# Altium PCB PCB1.PcbDoc
Units mil, origin at the board's own origin, x right, y up, seen from the top; angles counter-clockwise.
Board outline 2732.87 x 2035 mil, 2 copper layers (Top Layer, Bottom Layer); 21 components, 20 nets, 76 pads, 0 vias.
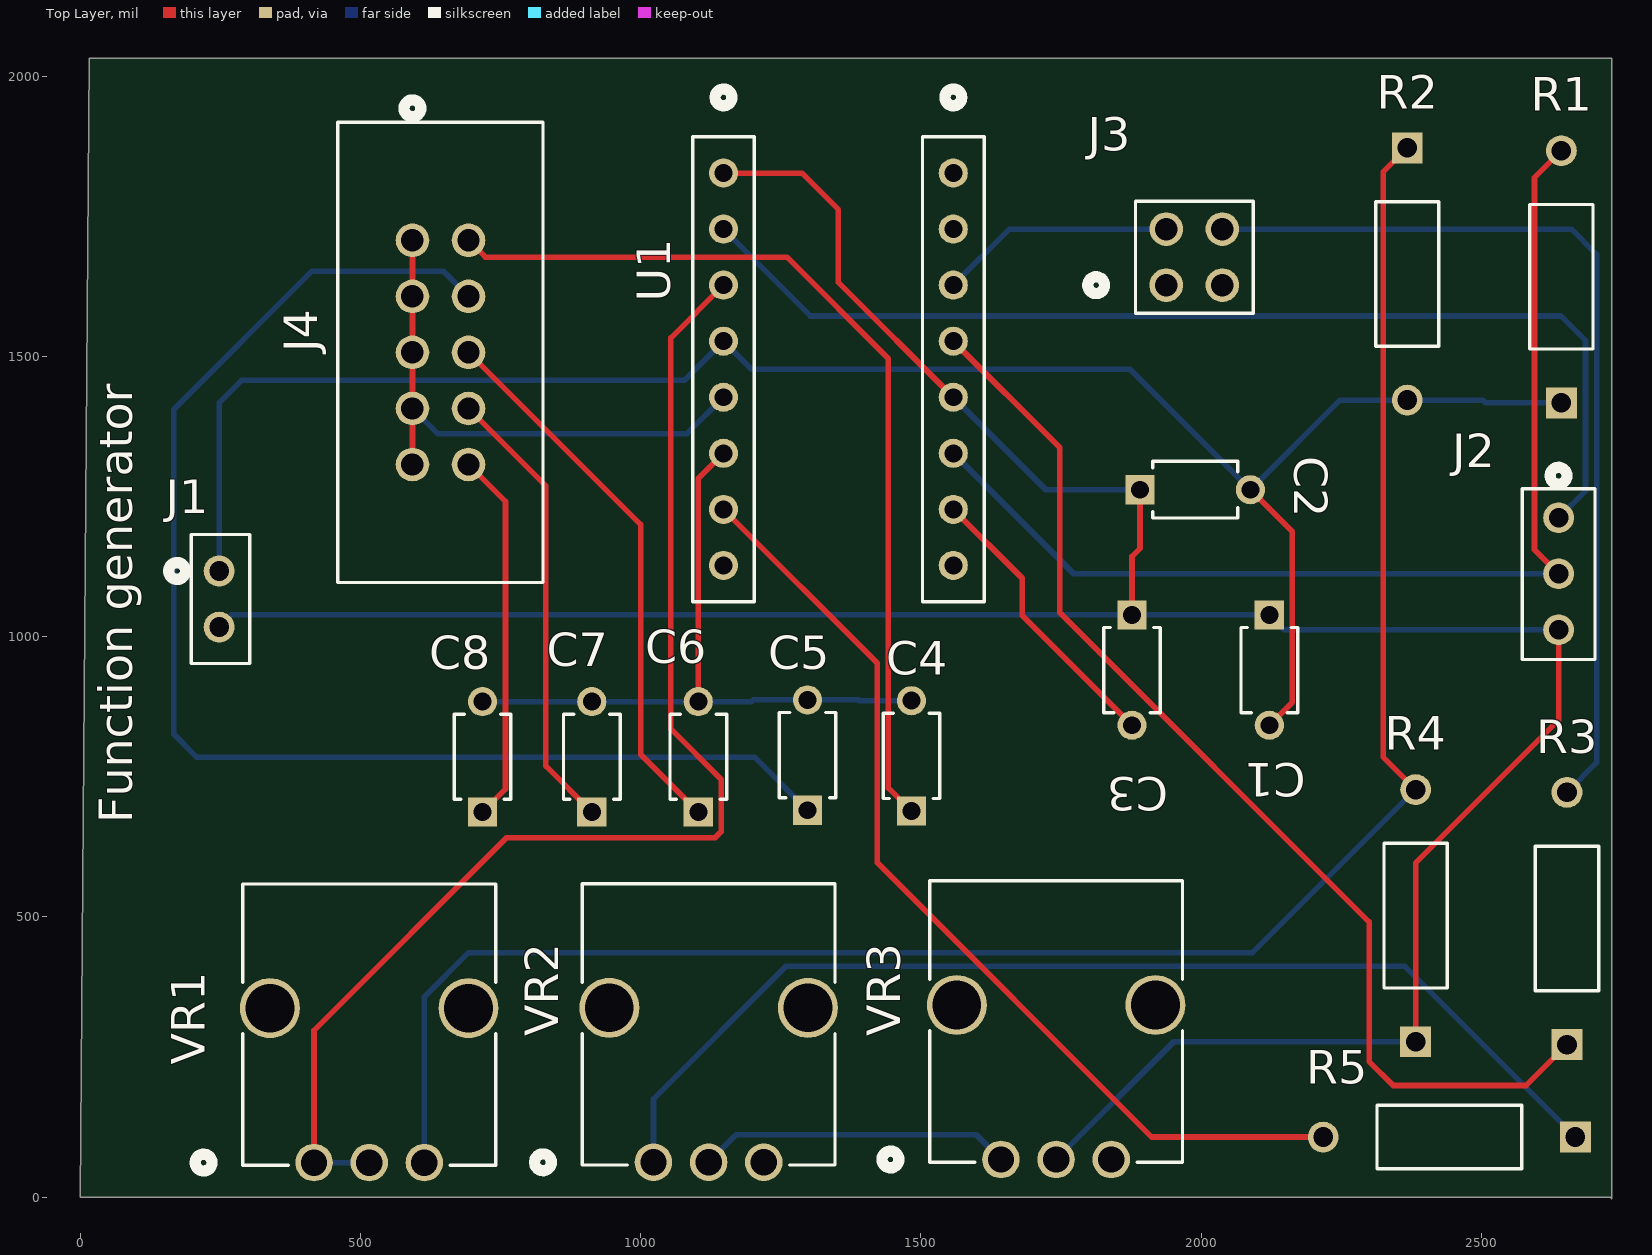
[diagram p0: Top Layer view]
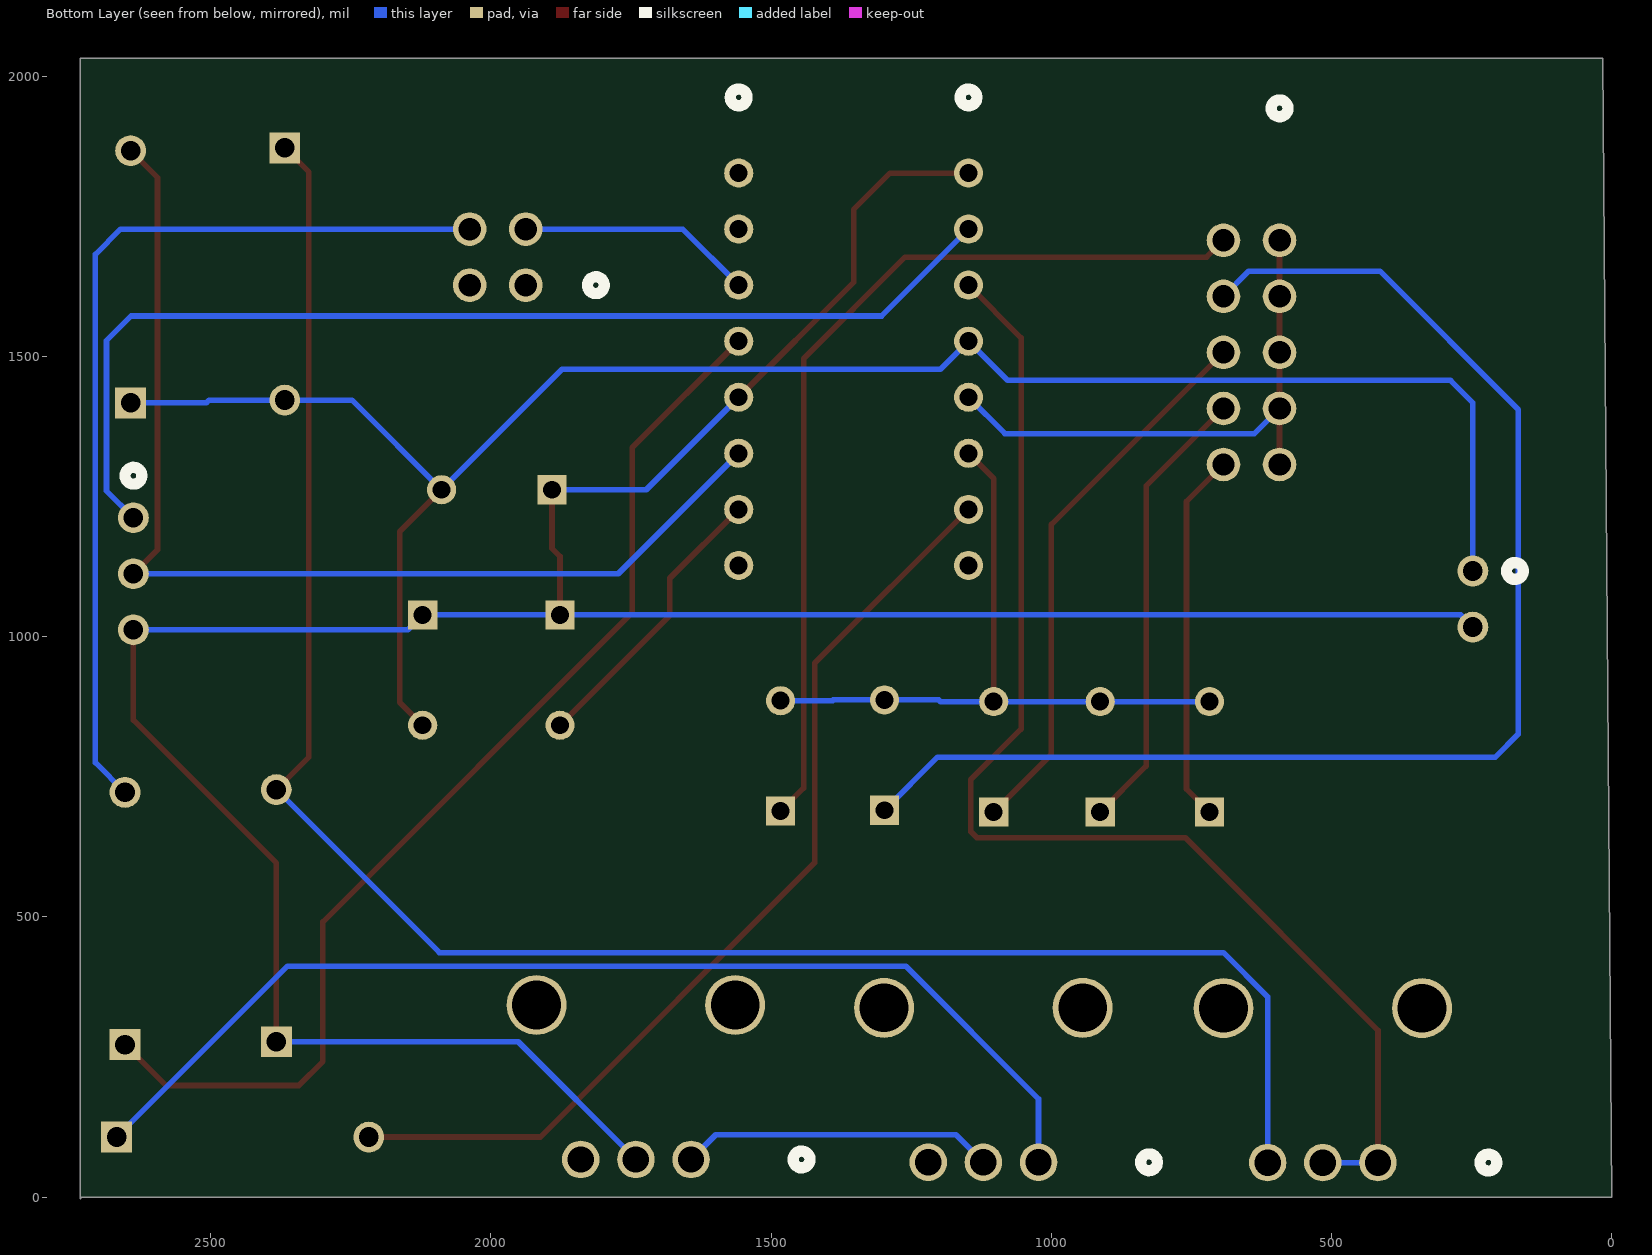
[diagram p1: Bottom Layer view, seen from below]
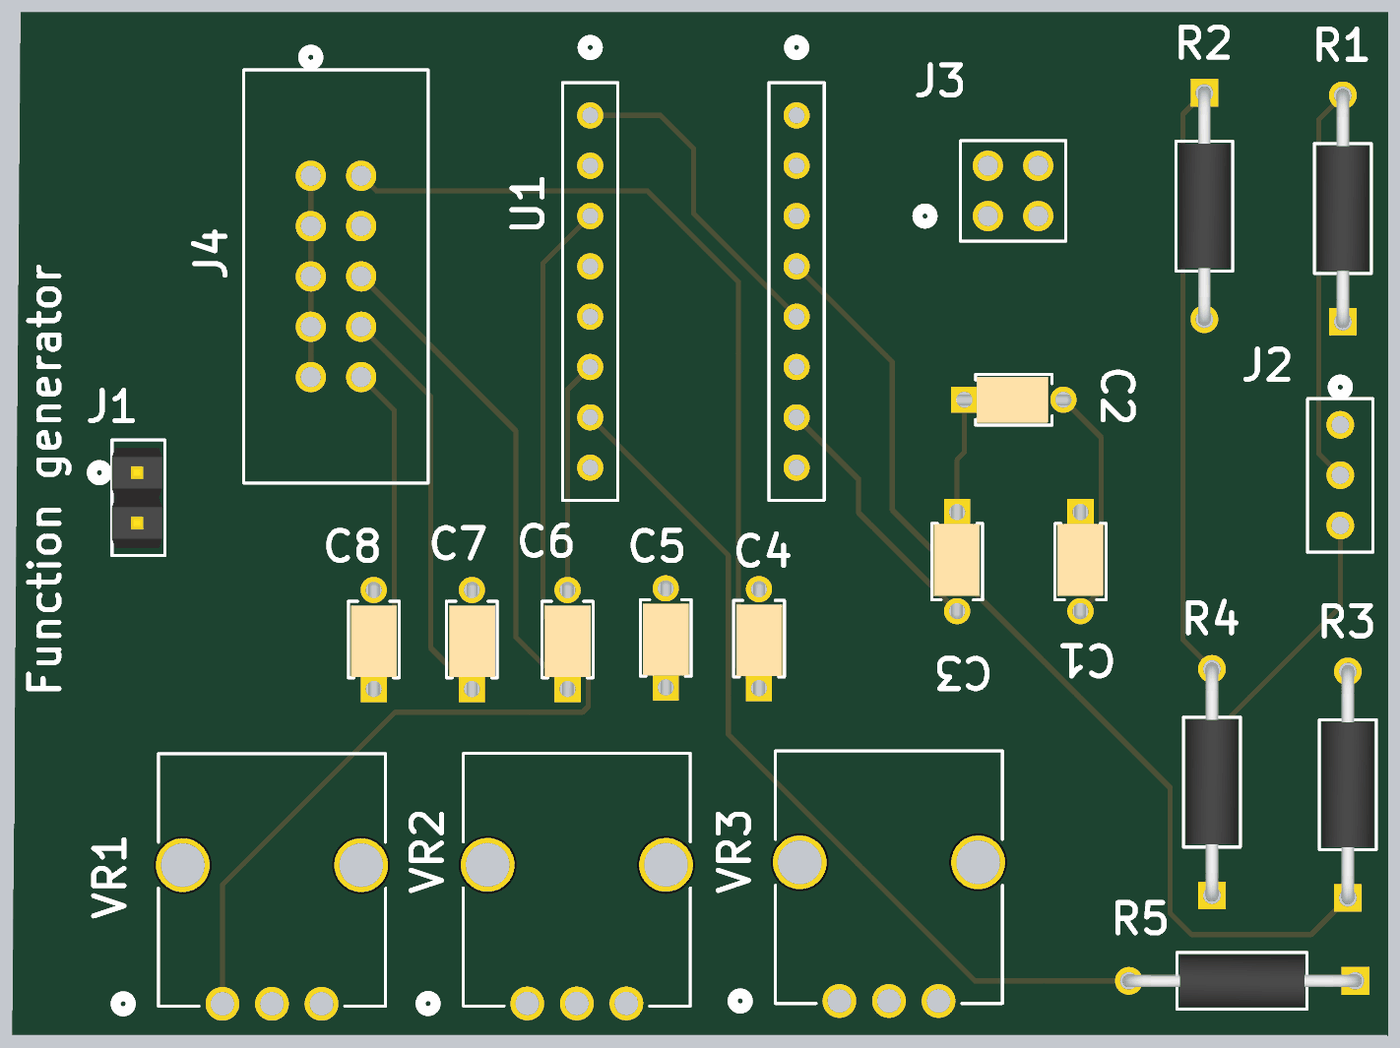
[diagram p2: 3D render of the assembled board from above, using the file's embedded part models]

## Layer stack, top to bottom
Top Solder: solder mask 0.4, Solder Resist, Dk 3.5
Top Layer: signal copper 1.4
Dielectric 1: dielectric 12.6, FR-4, Dk 4.8
Bottom Layer: signal copper 1.4
Bottom Solder: solder mask 0.4, Solder Resist, Dk 3.5

## Board outline
16.54,2032.05 2732.87,2032.05 2732.87,-2.95 2729.92,0 0,0

## Design rules (kind name [scope] priority, off if disabled: settings)
Clearance [All] p1: gap=10 ignorepadtopadclearanceinfootprint=FALSE
PolygonConnect [All] p1: connectstyle=Relief reliefconductorwidth=10 reliefentries=4 polygonreliefangle="90 Angle" airgapwidth=10
RoutingVias [All] p1: holewidth=28 width=50 viastyle="Through Hole" minholewidth=28 minwidth=50 maxholewidth=28 maxwidth=50
SolderMaskExpansion [All] p1: expansion=4 istentingtop=FALSE
SupplyNets "Schematic Supply Nets" [InNet('GND')] p1: voltage=0.000
Width [All] p1: maxlimit=10 minlimit=10 preferedwidth=10
30 further rules are at their usual default settings.

## Components (designator, comment, footprint, x,y, rotation, side; value= is the part's Value field where it differs from the comment)
C1 "0.1uf" PCBComponent_1 2151.75,993.66 r270 top value=100µF
C2 "100uf" PCBComponent_1 1936.02,1292.05 r0 top value=100µF
C3 "10uf" PCBComponent_1 1906.75,993.66 r270 top value=100µF
C4 "10uf" PCBComponent_1 1453.13,733.75 r90 top value=100µF
C5 "1uf" PCBComponent_1 1267.87,735.2 r90 top value=100µF
C6 "47000pf" PCBComponent_1 1072.87,732.05 r90 top value=100µF
C7 "2200pf" PCBComponent_1 882.87,732.05 r90 top value=100µF
C8 "100pf" PCBComponent_1 687.87,732.05 r90 top value=100µF
J1 "2x1" "PCBComponent_1 - duplicate4" 252.87,1062.05 r270 top
J2 "3x1" "PCBComponent_1 - duplicate7" 2637.87,1112.05 r180 top
J3 "2x2" "PCBComponent_1 - duplicate6" 1937.87,1627.05 r0 top
J4 "2x5" "PCBComponent_1 - duplicate5" 457.87,1927.05 r270 top
R1 "1k" "PCBComponent_1 - duplicate" 2652.87,1657.05 r90 top value=1kR
R2 "5k1" "PCBComponent_1 - duplicate" 2357.87,1632.05 r270 top value=5.1kΩ
R3 "330" "PCBComponent_1 - duplicate" 2662.87,512.05 r90 top value=330Ω
R4 "5k1" "PCBComponent_1 - duplicate" 2392.87,517.05 r90 top value=5.1kΩ
R5 "5k1" "PCBComponent_1 - duplicate" 2427.87,117.05 r180 top value=5.1kΩ
U1 "XR2206" "PCBComponent_1 - duplicate2" 1302.87,1552.05 r0 top
VR1 "50k" "PCBComponent_1 - duplicate3" 537.28,276.46 r0 top value=50kΩ
VR2 "50k" "PCBComponent_1 - duplicate3" 1142.87,277.05 r0 top value=50kΩ
VR3 "100k" "PCBComponent_1 - duplicate3" 1762.87,282.05 r0 top value=50kΩ

## Footprints (in the part's own frame and the unit in brackets; to place one, negate y for a bottom-side part, rotate by r counter-clockwise, add the part's x,y. Pads: shape width x height; smd on the part's side, far side on the other; paste and mask are expansions set on the pad)
PCBComponent_1 [mil]
  rect 52x52 / inner round 60 / far side rect 52x52 hole 32 paste-99999 mask+0: 1(-45,-30)
  round 52 / inner round 60 / far side round 52 hole 32 paste-99999 mask+0: 2(151.85,-30)
  silkscreen extent -23,-80 129,21, body extent -70,-76 170,15, height 142
"PCBComponent_1 - duplicate" [mil]
  rect 55x55 / inner round 60 / far side rect 55x55 hole 35 paste-99999 mask+0: 1(-240,10)
  round 55 / inner round 60 / far side round 55 hole 35 paste-99999 mask+0: 2(210,10)
  silkscreen extent -144,-47 114,66, body extent -252,-41 222,61, height 103
"PCBComponent_1 - duplicate2" [mil]
  round 52 / inner round 60 / far side round 52 hole 32 paste-99999 mask+0: 1(-155,275) 2(-155,175) 3(-155,75) 4(-155,-25) 5(-155,-125) 6(-155,-225) 7(-155,-325) 8(-155,-425) 9(255,-425) 10(255,-325) 11(255,-225) 12(255,-125) 13(255,-25) 14(255,75) 15(255,175) 16(255,275)
  silkscreen extent -210,-490 310,425
"PCBComponent_1 - duplicate3" [mil]
  round 67 / inner round 60 / far side round 67 hole 47 paste-99999 mask+0: 1(-120,-215) 2w(-21.58,-215) 3(76.85,-215)
  round 107 / inner round 60 / far side round 107 hole 87 unplated: 4(-198.74,60.59) 5(155.59,60.59)
  silkscreen extent -332,-230 204,282
"PCBComponent_1 - duplicate4" [mil]
  round 55 / inner round 60 / far side round 55 hole 35 paste-99999 mask+0: 1(-55,-5) 2(45,-5)
  silkscreen extent -120,-95 110,50, body extent -105,-55 95,45, height 500
"PCBComponent_1 - duplicate5" [mil]
  round 60 hole 40 paste-99999 mask+0: 1(220,135) 2(320,135) 3(420,135) 4(520,135) 5(620,135) 6(220,235) 7(320,235) 8(420,235) 9(520,235) 10(620,235)
  silkscreen extent -30,2 830,368
"PCBComponent_1 - duplicate6" [mil]
  round 60 hole 40 paste-99999 mask+0: 1(0,0) 2(100,0) 3(0,100) 4(100,100)
  silkscreen extent -140,-50 155,150
"PCBComponent_1 - duplicate7" [mil]
  round 55 / inner round 60 / far side round 55 hole 35 paste-99999 mask+0: 1(0,-100) 2(0,0) 3(0,100)
  silkscreen extent -65,-190 65,153

## Part data
C1: library part Capacitor_3, Case/Package=Radial, Dielectric Material=Ceramic, Manufacturer="United Chemi-Con", Manufacturer Part Number=KTD101B107M99A0B00, Max Operating Temperature=125°C, Min Operating Temperature=-55°C, Supplier Part Number=565-KTD101B107M99A0B00-ND, Tolerance=20%, Voltage Rating=100V, Category="Ceramic Capacitors", China RoHS=Compliant, ComponentLink1Description=https://datasheet.octopart.com:443/KTD101B107M99A0B00-Nippon-Chemicon-datasheet-182100469.pdf?src-supplier=IHS, ComponentLink1URL=https://datasheet.octopart.com:443/KTD101B107M99A0B00-Nippon-Chemicon-datasheet-182100469.pdf?src-supplier=IHS, ComponentLink2Description=https://datasheet.octopart.com:443/KTD101B107M99A0B00-United-Chemi-Con-datasheet-154730662.pdf?src-supplier=Electro+Sonic, ComponentLink2URL=https://datasheet.octopart.com:443/KTD101B107M99A0B00-United-Chemi-Con-datasheet-154730662.pdf?src-supplier=Electro+Sonic, Contact Plating=Tin, Height=20mm, Height - Seated (Max)=20.0152mm, Lead Pitch=24.9936mm, Lead/Base Style=Straight, Length=28.5mm, Lifecycle Status=Production, Mounting Technology="Through Hole", Number of Terminals=2, Pricing="1=30.55, 10=24.126, 50=22.6442, 100=21.9445 (USD)", REACH SVHC=Yes, RoHS=Compliant, Stock=1030, Supplier=DigiKey, Terminal Pitch=25mm, Voltage Rating (DC)=100V, Width=9mm
C2: library part Capacitor, Case/Package=Radial, Dielectric Material=Ceramic, Manufacturer="United Chemi-Con", Manufacturer Part Number=KTD101B107M99A0B00, Max Operating Temperature=125°C, Min Operating Temperature=-55°C, Supplier Part Number=565-KTD101B107M99A0B00-ND, Tolerance=20%, Voltage Rating=100V, Category="Ceramic Capacitors", China RoHS=Compliant, ComponentLink1Description=https://datasheet.octopart.com:443/KTD101B107M99A0B00-Nippon-Chemicon-datasheet-182100469.pdf?src-supplier=IHS, ComponentLink1URL=https://datasheet.octopart.com:443/KTD101B107M99A0B00-Nippon-Chemicon-datasheet-182100469.pdf?src-supplier=IHS, ComponentLink2Description=https://datasheet.octopart.com:443/KTD101B107M99A0B00-United-Chemi-Con-datasheet-154730662.pdf?src-supplier=Electro+Sonic, ComponentLink2URL=https://datasheet.octopart.com:443/KTD101B107M99A0B00-United-Chemi-Con-datasheet-154730662.pdf?src-supplier=Electro+Sonic, Contact Plating=Tin, Height=20mm, Height - Seated (Max)=20.0152mm, Lead Pitch=24.9936mm, Lead/Base Style=Straight, Length=28.5mm, Lifecycle Status=Production, Mounting Technology="Through Hole", Number of Terminals=2, Pricing="1=30.55, 10=24.126, 50=22.6442, 100=21.9445 (USD)", REACH SVHC=Yes, RoHS=Compliant, Stock=1030, Supplier=DigiKey, Terminal Pitch=25mm, Voltage Rating (DC)=100V, Width=9mm
C3: library part Capacitor_4, Case/Package=Radial, Dielectric Material=Ceramic, Manufacturer="United Chemi-Con", Manufacturer Part Number=KTD101B107M99A0B00, Max Operating Temperature=125°C, Min Operating Temperature=-55°C, Supplier Part Number=565-KTD101B107M99A0B00-ND, Tolerance=20%, Voltage Rating=100V, Category="Ceramic Capacitors", China RoHS=Compliant, ComponentLink1Description=https://datasheet.octopart.com:443/KTD101B107M99A0B00-Nippon-Chemicon-datasheet-182100469.pdf?src-supplier=IHS, ComponentLink1URL=https://datasheet.octopart.com:443/KTD101B107M99A0B00-Nippon-Chemicon-datasheet-182100469.pdf?src-supplier=IHS, ComponentLink2Description=https://datasheet.octopart.com:443/KTD101B107M99A0B00-United-Chemi-Con-datasheet-154730662.pdf?src-supplier=Electro+Sonic, ComponentLink2URL=https://datasheet.octopart.com:443/KTD101B107M99A0B00-United-Chemi-Con-datasheet-154730662.pdf?src-supplier=Electro+Sonic, Contact Plating=Tin, Height=20mm, Height - Seated (Max)=20.0152mm, Lead Pitch=24.9936mm, Lead/Base Style=Straight, Length=28.5mm, Lifecycle Status=Production, Mounting Technology="Through Hole", Number of Terminals=2, Pricing="1=30.55, 10=24.126, 50=22.6442, 100=21.9445 (USD)", REACH SVHC=Yes, RoHS=Compliant, Stock=1030, Supplier=DigiKey, Terminal Pitch=25mm, Voltage Rating (DC)=100V, Width=9mm
C4: library part Capacitor_5, Case/Package=Radial, Dielectric Material=Ceramic, Manufacturer="United Chemi-Con", Manufacturer Part Number=KTD101B107M99A0B00, Max Operating Temperature=125°C, Min Operating Temperature=-55°C, Supplier Part Number=565-KTD101B107M99A0B00-ND, Tolerance=20%, Voltage Rating=100V, Category="Ceramic Capacitors", China RoHS=Compliant, ComponentLink1Description=https://datasheet.octopart.com:443/KTD101B107M99A0B00-Nippon-Chemicon-datasheet-182100469.pdf?src-supplier=IHS, ComponentLink1URL=https://datasheet.octopart.com:443/KTD101B107M99A0B00-Nippon-Chemicon-datasheet-182100469.pdf?src-supplier=IHS, ComponentLink2Description=https://datasheet.octopart.com:443/KTD101B107M99A0B00-United-Chemi-Con-datasheet-154730662.pdf?src-supplier=Electro+Sonic, ComponentLink2URL=https://datasheet.octopart.com:443/KTD101B107M99A0B00-United-Chemi-Con-datasheet-154730662.pdf?src-supplier=Electro+Sonic, Contact Plating=Tin, Height=20mm, Height - Seated (Max)=20.0152mm, Lead Pitch=24.9936mm, Lead/Base Style=Straight, Length=28.5mm, Lifecycle Status=Production, Mounting Technology="Through Hole", Number of Terminals=2, Pricing="1=30.55, 10=24.126, 50=22.6442, 100=21.9445 (USD)", REACH SVHC=Yes, RoHS=Compliant, Stock=1030, Supplier=DigiKey, Terminal Pitch=25mm, Voltage Rating (DC)=100V, Width=9mm
C5: library part Capacitor_1, Case/Package=Radial, Dielectric Material=Ceramic, Manufacturer="United Chemi-Con", Manufacturer Part Number=KTD101B107M99A0B00, Max Operating Temperature=125°C, Min Operating Temperature=-55°C, Supplier Part Number=565-KTD101B107M99A0B00-ND, Tolerance=20%, Voltage Rating=100V, Category="Ceramic Capacitors", China RoHS=Compliant, ComponentLink1Description=https://datasheet.octopart.com:443/KTD101B107M99A0B00-Nippon-Chemicon-datasheet-182100469.pdf?src-supplier=IHS, ComponentLink1URL=https://datasheet.octopart.com:443/KTD101B107M99A0B00-Nippon-Chemicon-datasheet-182100469.pdf?src-supplier=IHS, ComponentLink2Description=https://datasheet.octopart.com:443/KTD101B107M99A0B00-United-Chemi-Con-datasheet-154730662.pdf?src-supplier=Electro+Sonic, ComponentLink2URL=https://datasheet.octopart.com:443/KTD101B107M99A0B00-United-Chemi-Con-datasheet-154730662.pdf?src-supplier=Electro+Sonic, Contact Plating=Tin, Height=20mm, Height - Seated (Max)=20.0152mm, Lead Pitch=24.9936mm, Lead/Base Style=Straight, Length=28.5mm, Lifecycle Status=Production, Mounting Technology="Through Hole", Number of Terminals=2, Pricing="1=30.55, 10=24.126, 50=22.6442, 100=21.9445 (USD)", REACH SVHC=Yes, RoHS=Compliant, Stock=1030, Supplier=DigiKey, Terminal Pitch=25mm, Voltage Rating (DC)=100V, Width=9mm
C6: library part Capacitor_2, Case/Package=Radial, Dielectric Material=Ceramic, Manufacturer="United Chemi-Con", Manufacturer Part Number=KTD101B107M99A0B00, Max Operating Temperature=125°C, Min Operating Temperature=-55°C, Supplier Part Number=565-KTD101B107M99A0B00-ND, Tolerance=20%, Voltage Rating=100V, Category="Ceramic Capacitors", China RoHS=Compliant, ComponentLink1Description=https://datasheet.octopart.com:443/KTD101B107M99A0B00-Nippon-Chemicon-datasheet-182100469.pdf?src-supplier=IHS, ComponentLink1URL=https://datasheet.octopart.com:443/KTD101B107M99A0B00-Nippon-Chemicon-datasheet-182100469.pdf?src-supplier=IHS, ComponentLink2Description=https://datasheet.octopart.com:443/KTD101B107M99A0B00-United-Chemi-Con-datasheet-154730662.pdf?src-supplier=Electro+Sonic, ComponentLink2URL=https://datasheet.octopart.com:443/KTD101B107M99A0B00-United-Chemi-Con-datasheet-154730662.pdf?src-supplier=Electro+Sonic, Contact Plating=Tin, Height=20mm, Height - Seated (Max)=20.0152mm, Lead Pitch=24.9936mm, Lead/Base Style=Straight, Length=28.5mm, Lifecycle Status=Production, Mounting Technology="Through Hole", Number of Terminals=2, Pricing="1=30.55, 10=24.126, 50=22.6442, 100=21.9445 (USD)", REACH SVHC=Yes, RoHS=Compliant, Stock=1030, Supplier=DigiKey, Terminal Pitch=25mm, Voltage Rating (DC)=100V, Width=9mm
C7: library part Capacitor_6, Case/Package=Radial, Dielectric Material=Ceramic, Manufacturer="United Chemi-Con", Manufacturer Part Number=KTD101B107M99A0B00, Max Operating Temperature=125°C, Min Operating Temperature=-55°C, Supplier Part Number=565-KTD101B107M99A0B00-ND, Tolerance=20%, Voltage Rating=100V, Category="Ceramic Capacitors", China RoHS=Compliant, ComponentLink1Description=https://datasheet.octopart.com:443/KTD101B107M99A0B00-Nippon-Chemicon-datasheet-182100469.pdf?src-supplier=IHS, ComponentLink1URL=https://datasheet.octopart.com:443/KTD101B107M99A0B00-Nippon-Chemicon-datasheet-182100469.pdf?src-supplier=IHS, ComponentLink2Description=https://datasheet.octopart.com:443/KTD101B107M99A0B00-United-Chemi-Con-datasheet-154730662.pdf?src-supplier=Electro+Sonic, ComponentLink2URL=https://datasheet.octopart.com:443/KTD101B107M99A0B00-United-Chemi-Con-datasheet-154730662.pdf?src-supplier=Electro+Sonic, Contact Plating=Tin, Height=20mm, Height - Seated (Max)=20.0152mm, Lead Pitch=24.9936mm, Lead/Base Style=Straight, Length=28.5mm, Lifecycle Status=Production, Mounting Technology="Through Hole", Number of Terminals=2, Pricing="1=30.55, 10=24.126, 50=22.6442, 100=21.9445 (USD)", REACH SVHC=Yes, RoHS=Compliant, Stock=1030, Supplier=DigiKey, Terminal Pitch=25mm, Voltage Rating (DC)=100V, Width=9mm
C8: library part Capacitor_7, Case/Package=Radial, Dielectric Material=Ceramic, Manufacturer="United Chemi-Con", Manufacturer Part Number=KTD101B107M99A0B00, Max Operating Temperature=125°C, Min Operating Temperature=-55°C, Supplier Part Number=565-KTD101B107M99A0B00-ND, Tolerance=20%, Voltage Rating=100V, Category="Ceramic Capacitors", China RoHS=Compliant, ComponentLink1Description=https://datasheet.octopart.com:443/KTD101B107M99A0B00-Nippon-Chemicon-datasheet-182100469.pdf?src-supplier=IHS, ComponentLink1URL=https://datasheet.octopart.com:443/KTD101B107M99A0B00-Nippon-Chemicon-datasheet-182100469.pdf?src-supplier=IHS, ComponentLink2Description=https://datasheet.octopart.com:443/KTD101B107M99A0B00-United-Chemi-Con-datasheet-154730662.pdf?src-supplier=Electro+Sonic, ComponentLink2URL=https://datasheet.octopart.com:443/KTD101B107M99A0B00-United-Chemi-Con-datasheet-154730662.pdf?src-supplier=Electro+Sonic, Contact Plating=Tin, Height=20mm, Height - Seated (Max)=20.0152mm, Lead Pitch=24.9936mm, Lead/Base Style=Straight, Length=28.5mm, Lifecycle Status=Production, Mounting Technology="Through Hole", Number of Terminals=2, Pricing="1=30.55, 10=24.126, 50=22.6442, 100=21.9445 (USD)", REACH SVHC=Yes, RoHS=Compliant, Stock=1030, Supplier=DigiKey, Terminal Pitch=25mm, Voltage Rating (DC)=100V, Width=9mm
J1: library part Header_2, Color=Black, Current Rating=3A, Dielectric Material=Polyester, Manufacturer=Sullins, Manufacturer Part Number=PPPC022LFBN-RC, Supplier Part Number=S7105-ND, Category="Card Edge Connectors", ComponentLink1Description=https://datasheet.octopart.com:443/PPPC022LFBN-RC-Sullins-datasheet-138810743.pdf?src-supplier=IHS, ComponentLink1URL=https://datasheet.octopart.com:443/PPPC022LFBN-RC-Sullins-datasheet-138810743.pdf?src-supplier=IHS, ComponentLink2Description=https://datasheet.octopart.com:443/PPPC022LFBN-RC-Sullins-datasheet-41308905.pdf?src-supplier=Future+Electronics, ComponentLink2URL=https://datasheet.octopart.com:443/PPPC022LFBN-RC-Sullins-datasheet-41308905.pdf?src-supplier=Future+Electronics, ComponentLink3Description=https://datasheet.octopart.com:443/PPPC022LFBN-RC-Sullins-datasheet-12511165.pdf?src-supplier=Future+Electronics, ComponentLink3URL=https://datasheet.octopart.com:443/PPPC022LFBN-RC-Sullins-datasheet-12511165.pdf?src-supplier=Future+Electronics, ComponentLink4Description=https://datasheet.octopart.com:443/PPPC022LFBN-RC-Sullins-datasheet-12463.pdf?src-supplier=DigiKey, ComponentLink4URL=https://datasheet.octopart.com:443/PPPC022LFBN-RC-Sullins-datasheet-12463.pdf?src-supplier=DigiKey, Connector Type="Header, Socket", Contact Gender=Female, Contact Material=Bronze, Contact Plating=Gold, Height=8.5mm, Housing Material=Plastic, Lead Free="Lead Free", Length=5.58mm, Lifecycle Status=Production, Mounting Technology="Through Hole", Number of Positions=4, Number of Rows=2, Packaging=Bulk, Pins=4, Pitch=2.54mm, Pricing="1=0.46, 10=0.394, 100=0.3349, 500=0.29888, 1000=0.28461, 5000=0.25405, 10000=0.24193 (USD)", REACH SVHC=Yes, RoHS=Compliant, Row Spacing=2.54mm, Stock=8090, Supplier=DigiKey, Terminal Pitch=2.54mm, Termination=Solder, Width=5mm
J2: library part Header_3, Color=Black, Current Rating=3A, Dielectric Material=Polyester, Manufacturer=Sullins, Manufacturer Part Number=PPPC022LFBN-RC, Supplier Part Number=S7105-ND, Category="Card Edge Connectors", ComponentLink1Description=https://datasheet.octopart.com:443/PPPC022LFBN-RC-Sullins-datasheet-138810743.pdf?src-supplier=IHS, ComponentLink1URL=https://datasheet.octopart.com:443/PPPC022LFBN-RC-Sullins-datasheet-138810743.pdf?src-supplier=IHS, ComponentLink2Description=https://datasheet.octopart.com:443/PPPC022LFBN-RC-Sullins-datasheet-41308905.pdf?src-supplier=Future+Electronics, ComponentLink2URL=https://datasheet.octopart.com:443/PPPC022LFBN-RC-Sullins-datasheet-41308905.pdf?src-supplier=Future+Electronics, ComponentLink3Description=https://datasheet.octopart.com:443/PPPC022LFBN-RC-Sullins-datasheet-12511165.pdf?src-supplier=Future+Electronics, ComponentLink3URL=https://datasheet.octopart.com:443/PPPC022LFBN-RC-Sullins-datasheet-12511165.pdf?src-supplier=Future+Electronics, ComponentLink4Description=https://datasheet.octopart.com:443/PPPC022LFBN-RC-Sullins-datasheet-12463.pdf?src-supplier=DigiKey, ComponentLink4URL=https://datasheet.octopart.com:443/PPPC022LFBN-RC-Sullins-datasheet-12463.pdf?src-supplier=DigiKey, Connector Type="Header, Socket", Contact Gender=Female, Contact Material=Bronze, Contact Plating=Gold, Height=8.5mm, Housing Material=Plastic, Lead Free="Lead Free", Length=5.58mm, Lifecycle Status=Production, Mounting Technology="Through Hole", Number of Positions=4, Number of Rows=2, Packaging=Bulk, Pins=4, Pitch=2.54mm, Pricing="1=0.46, 10=0.394, 100=0.3349, 500=0.29888, 1000=0.28461, 5000=0.25405, 10000=0.24193 (USD)", REACH SVHC=Yes, RoHS=Compliant, Row Spacing=2.54mm, Stock=8090, Supplier=DigiKey, Terminal Pitch=2.54mm, Termination=Solder, Width=5mm
J3: library part Header, Color=Black, Current Rating=3A, Dielectric Material=Polyester, Manufacturer=Sullins, Manufacturer Part Number=PPPC022LFBN-RC, Supplier Part Number=S7105-ND, Category="Card Edge Connectors", ComponentLink1Description=https://datasheet.octopart.com:443/PPPC022LFBN-RC-Sullins-datasheet-138810743.pdf?src-supplier=IHS, ComponentLink1URL=https://datasheet.octopart.com:443/PPPC022LFBN-RC-Sullins-datasheet-138810743.pdf?src-supplier=IHS, ComponentLink2Description=https://datasheet.octopart.com:443/PPPC022LFBN-RC-Sullins-datasheet-41308905.pdf?src-supplier=Future+Electronics, ComponentLink2URL=https://datasheet.octopart.com:443/PPPC022LFBN-RC-Sullins-datasheet-41308905.pdf?src-supplier=Future+Electronics, ComponentLink3Description=https://datasheet.octopart.com:443/PPPC022LFBN-RC-Sullins-datasheet-12511165.pdf?src-supplier=Future+Electronics, ComponentLink3URL=https://datasheet.octopart.com:443/PPPC022LFBN-RC-Sullins-datasheet-12511165.pdf?src-supplier=Future+Electronics, ComponentLink4Description=https://datasheet.octopart.com:443/PPPC022LFBN-RC-Sullins-datasheet-12463.pdf?src-supplier=DigiKey, ComponentLink4URL=https://datasheet.octopart.com:443/PPPC022LFBN-RC-Sullins-datasheet-12463.pdf?src-supplier=DigiKey, Connector Type="Header, Socket", Contact Gender=Female, Contact Material=Bronze, Contact Plating=Gold, Height=8.5mm, Housing Material=Plastic, Lead Free="Lead Free", Length=5.58mm, Lifecycle Status=Production, Mounting Technology="Through Hole", Number of Positions=4, Number of Rows=2, Packaging=Bulk, Pins=4, Pitch=2.54mm, Pricing="1=0.46, 10=0.394, 100=0.3349, 500=0.29888, 1000=0.28461, 5000=0.25405, 10000=0.24193 (USD)", REACH SVHC=Yes, RoHS=Compliant, Row Spacing=2.54mm, Stock=8090, Supplier=DigiKey, Terminal Pitch=2.54mm, Termination=Solder, Width=5mm
J4: library part Header_1, Color=Black, Current Rating=3A, Dielectric Material=Polyester, Manufacturer=Sullins, Manufacturer Part Number=PPPC022LFBN-RC, Supplier Part Number=S7105-ND, Category="Card Edge Connectors", ComponentLink1Description=https://datasheet.octopart.com:443/PPPC022LFBN-RC-Sullins-datasheet-138810743.pdf?src-supplier=IHS, ComponentLink1URL=https://datasheet.octopart.com:443/PPPC022LFBN-RC-Sullins-datasheet-138810743.pdf?src-supplier=IHS, ComponentLink2Description=https://datasheet.octopart.com:443/PPPC022LFBN-RC-Sullins-datasheet-41308905.pdf?src-supplier=Future+Electronics, ComponentLink2URL=https://datasheet.octopart.com:443/PPPC022LFBN-RC-Sullins-datasheet-41308905.pdf?src-supplier=Future+Electronics, ComponentLink3Description=https://datasheet.octopart.com:443/PPPC022LFBN-RC-Sullins-datasheet-12511165.pdf?src-supplier=Future+Electronics, ComponentLink3URL=https://datasheet.octopart.com:443/PPPC022LFBN-RC-Sullins-datasheet-12511165.pdf?src-supplier=Future+Electronics, ComponentLink4Description=https://datasheet.octopart.com:443/PPPC022LFBN-RC-Sullins-datasheet-12463.pdf?src-supplier=DigiKey, ComponentLink4URL=https://datasheet.octopart.com:443/PPPC022LFBN-RC-Sullins-datasheet-12463.pdf?src-supplier=DigiKey, Connector Type="Header, Socket", Contact Gender=Female, Contact Material=Bronze, Contact Plating=Gold, Height=8.5mm, Housing Material=Plastic, Lead Free="Lead Free", Length=5.58mm, Lifecycle Status=Production, Mounting Technology="Through Hole", Number of Positions=4, Number of Rows=2, Packaging=Bulk, Pins=4, Pitch=2.54mm, Pricing="1=0.46, 10=0.394, 100=0.3349, 500=0.29888, 1000=0.28461, 5000=0.25405, 10000=0.24193 (USD)", REACH SVHC=Yes, RoHS=Compliant, Row Spacing=2.54mm, Stock=8090, Supplier=DigiKey, Terminal Pitch=2.54mm, Termination=Solder, Width=5mm
R1: library part Resistor, Case/Package=0402, Manufacturer=Yageo, Manufacturer Part Number=RC0402FR-07267KL, Max Operating Temperature=155°C, Min Operating Temperature=-55°C, Package Height=0.35mm, Package Length=1mm, Package Shape=Rectangular, Package Width=0.5mm, Power=62.5mW, Rated Temperature=70°C, Resistor Type="FIXED RESISTOR", Supplier Part Number=YAG3079CT-ND, Temperature Coefficient (ppm/Cel)=100, Tolerance=1%, Working Voltage=50V, Additional Feature="LASER TRIMMABLE", Category="Chip SMD Resistors", ComponentLink1Description=https://datasheet.ciiva.com:443/pdfs/VipMasterIC/IC/YAGO/YAGO-S-A0008145938/YAGO-S-A0008145938-1.pdf?src-supplier=IHS+Markit, ComponentLink1URL=https://datasheet.ciiva.com:443/pdfs/VipMasterIC/IC/YAGO/YAGO-S-A0008145938/YAGO-S-A0008145938-1.pdf?src-supplier=IHS+Markit, ComponentLink2Description=https://datasheet.ciiva.com/12577/pyu-rc0402-51-rohs-l-6-r-12577167.pdf?src-supplier=Mouser, ComponentLink2URL=https://datasheet.ciiva.com/12577/pyu-rc0402-51-rohs-l-6-r-12577167.pdf?src-supplier=Mouser, ComponentLink3Description=https://datasheet.ciiva.com/8886/pyu-rc0402-51-rohs-l-6-8886495.pdf?src-supplier=Avnet, ComponentLink3URL=https://datasheet.ciiva.com/8886/pyu-rc0402-51-rohs-l-6-8886495.pdf?src-supplier=Avnet, Construction=Chip, JESD-609 Code=e3, Mounting Technology="Surface Mount", Packaging="Tape and Reel", Pins=2, Pricing="1=0.1, 10=0.007, 100=0.0051, 1000=0.00306 (USD)", Reach SVHC Compliant=Yes, RoHS=Yes, RoHS Compliant=Yes, Stock=55854, Supplier=Digikey, Technology="METAL GLAZE/THICK FILM", Terminal Finish=Nickel, Termination=Wraparound
R2 R4 R5: library part Resistor_2, Case Code (Imperial)=0603, Manufacturer="Yageo Group", Manufacturer Part Number=RC0603FR-075K1L, Max Operating Temperature=155°C, Max Power Dissipation=100mW, Min Operating Temperature=-55°C, Supplier Part Number=311-5.10KHRCT-ND, Temperature Coefficient=100ppm/°C, Tolerance=1%, Voltage Rating=75V, Voltage Rating (DC)=50V, Case/Package=0603, Category="Chip SMD Resistors", China RoHS=Non-Compliant, ComponentLink1Description=https://datasheet.octopart.com:443/RC0603FR-075K1L-Yageo-datasheet-175887523.pdf?src-supplier=IHS, ComponentLink1URL=https://datasheet.octopart.com:443/RC0603FR-075K1L-Yageo-datasheet-175887523.pdf?src-supplier=IHS, ComponentLink2Description=https://datasheet.octopart.com:443/RC0603FR-075K1L-Yageo-datasheet-103092701.pdf?src-supplier=Upverter, ComponentLink2URL=https://datasheet.octopart.com:443/RC0603FR-075K1L-Yageo-datasheet-103092701.pdf?src-supplier=Upverter, ComponentLink3Description=https://datasheet.octopart.com:443/RC0603FR-075K1L-Yageo-datasheet-8328172.pdf?src-supplier=Farnell, ComponentLink3URL=https://datasheet.octopart.com:443/RC0603FR-075K1L-Yageo-datasheet-8328172.pdf?src-supplier=Farnell, ComponentLink4Description=https://datasheet.octopart.com:443/RC0603FR-075K1L-Yageo-datasheet-62067350.pdf?src-supplier=Farnell, ComponentLink4URL=https://datasheet.octopart.com:443/RC0603FR-075K1L-Yageo-datasheet-62067350.pdf?src-supplier=Farnell, ComponentLink5Description=https://datasheet.octopart.com:443/RC0603FR-075K1L-Yageo-datasheet-34211833.pdf?src-supplier=element14+APAC, ComponentLink5URL=https://datasheet.octopart.com:443/RC0603FR-075K1L-Yageo-datasheet-34211833.pdf?src-supplier=element14+APAC, ComponentLink6Description=https://datasheet.octopart.com:443/RC0603FR-075K1L-Yageo-datasheet-164759695.pdf?src-supplier=Future+Electronics, ComponentLink6URL=https://datasheet.octopart.com:443/RC0603FR-075K1L-Yageo-datasheet-164759695.pdf?src-supplier=Future+Electronics, ComponentLink7Description=https://datasheet.octopart.com:443/RC0603FR-075K1L-Yageo-datasheet-137700087.pdf?src-supplier=Future+Electronics, ComponentLink7URL=https://datasheet.octopart.com:443/RC0603FR-075K1L-Yageo-datasheet-137700087.pdf?src-supplier=Future+Electronics, ComponentLink8Description=https://datasheet.octopart.com:443/RC0603FR-075K1L-Yageo-datasheet-15599030.pdf?src-supplier=Future+Electronics, ComponentLink8URL=https://datasheet.octopart.com:443/RC0603FR-075K1L-Yageo-datasheet-15599030.pdf?src-supplier=Future+Electronics, ComponentLink9Description=https://datasheet.octopart.com:443/RC0603FR-075K1L-Yageo-datasheet-12596169.pdf?src-supplier=Future+Electronics, ComponentLink9URL=https://datasheet.octopart.com:443/RC0603FR-075K1L-Yageo-datasheet-12596169.pdf?src-supplier=Future+Electronics, ComponentLink10Description=https://datasheet.octopart.com:443/RC0603FR-075K1L-Yageo-datasheet-503470.pdf?src-supplier=Future+Electronics, ComponentLink10URL=https://datasheet.octopart.com:443/RC0603FR-075K1L-Yageo-datasheet-503470.pdf?src-supplier=Future+Electronics, ComponentLink11Description=https://datasheet.octopart.com:443/RC0603FR-075K1L-Yageo-datasheet-148775077.pdf?src-supplier=TME, ComponentLink11URL=https://datasheet.octopart.com:443/RC0603FR-075K1L-Yageo-datasheet-148775077.pdf?src-supplier=TME, ComponentLink12Description=https://datasheet.octopart.com:443/RC0603FR-075K1L-Yageo-datasheet-79472498.pdf?src-supplier=Megastar, ComponentLink12URL=https://datasheet.octopart.com:443/RC0603FR-075K1L-Yageo-datasheet-79472498.pdf?src-supplier=Megastar, ComponentLink13Description=https://datasheet.octopart.com/RC0603FR-075K1L-Yageo-datasheet-73766026.pdf, ComponentLink13URL=https://datasheet.octopart.com/RC0603FR-075K1L-Yageo-datasheet-73766026.pdf, ComponentLink14Description=https://datasheet.octopart.com:443/RC0603FR-075K1L-Yageo-datasheet-118562.pdf?src-supplier=DigiKey, ComponentLink14URL=https://datasheet.octopart.com:443/RC0603FR-075K1L-Yageo-datasheet-118562.pdf?src-supplier=DigiKey, ComponentLink15Description=http://sigma.octopart.com:80/rohs_statement/Yageo-company-2.pdf?src-supplier=Compliance+Statements, ComponentLink15URL=http://sigma.octopart.com:80/rohs_statement/Yageo-company-2.pdf?src-supplier=Compliance+Statements, ComponentLink16Description=http://sigma.octopart.com:80/conflict_mineral_statement/Yageo-company-3.pdf?src-supplier=Compliance+Statements, ComponentLink16URL=http://sigma.octopart.com:80/conflict_mineral_statement/Yageo-company-3.pdf?src-supplier=Compliance+Statements, Composition="Thick Film", Depth=800µm, Features="Moisture Resistant", Height=450µm, Lead Free="Lead Free", Lifecycle Status=Production, Military Standard=Not, Mounting Technology="Surface Mount", Number of Terminals=2, Number of Terminations=2, Packaging="Tape & Reel", Pins=2, Power Dissipation=100mW, Power Rating=100mW, Pricing="1=0.1, 10=0.009, 25=0.008, 50=0.0072, 100=0.0061, 250=0.00568 (USD)", REACH SVHC=Yes, RoHS=Compliant, Schedule B="8533210045, 8533210045|8533210045, 8533210045|8533210045|8533210045, 8533210045|8533210045|8533210045|8533210045", Stock=929248, Supplier=DigiKey, Termination=SMD/SMT, Width=800µm, Working Voltage=75V
R3: library part Resistor_1, Ambient Temperature Range High=70°C, Case/Package=2512, Manufacturer="TE Connectivity", Manufacturer Lifecycle Status=ACTIVE, Manufacturer Part Number=CRGP2512F330R, Max Operating Temperature=155°C, Min Operating Temperature=-55°C, Operating Supply Voltage=500V, Power Dissipation=2W, Supplier Part Number=A130715CT-ND, Temperature Coefficient=100ppm/°C, Tolerance=1%, Category="Chip SMD Resistors", China RoHS=Non-Compliant, ComponentLink1Description=https://sigma.octopart.com:443/114728873/technical_drawing/TE-Connectivity-CRGP2512F330R.pdf?src-supplier=TE+Connectivity, ComponentLink1URL=https://sigma.octopart.com:443/114728873/technical_drawing/TE-Connectivity-CRGP2512F330R.pdf?src-supplier=TE+Connectivity, ComponentLink2Description=https://datasheet.octopart.com:443/CRGP2512F330R-TE-Connectivity-datasheet-114718804.pdf?src-supplier=element14+APAC, ComponentLink2URL=https://datasheet.octopart.com:443/CRGP2512F330R-TE-Connectivity-datasheet-114718804.pdf?src-supplier=element14+APAC, ComponentLink3Description=https://datasheet.octopart.com:443/CRGP2512F330R-TE-Connectivity-datasheet-138898427.pdf?src-supplier=Upverter, ComponentLink3URL=https://datasheet.octopart.com:443/CRGP2512F330R-TE-Connectivity-datasheet-138898427.pdf?src-supplier=Upverter, ComponentLink4Description=https://datasheet.octopart.com:443/1-2176331-9-TE-Connectivity---AMP-datasheet-184935180.pdf?src-supplier=Master+Electronics, ComponentLink4URL=https://datasheet.octopart.com:443/1-2176331-9-TE-Connectivity---AMP-datasheet-184935180.pdf?src-supplier=Master+Electronics, ComponentLink5Description=https://datasheet.octopart.com:443/1-2176331-9-TE-Connectivity-datasheet-176339768.pdf?src-supplier=Sager+Electronics, ComponentLink5URL=https://datasheet.octopart.com:443/1-2176331-9-TE-Connectivity-datasheet-176339768.pdf?src-supplier=Sager+Electronics, ComponentLink6Description=https://datasheet.octopart.com:443/1-2176331-9-TE-Connectivity-datasheet-156004650.pdf?src-supplier=Future+Electronics, ComponentLink6URL=https://datasheet.octopart.com:443/1-2176331-9-TE-Connectivity-datasheet-156004650.pdf?src-supplier=Future+Electronics, Composition="Thick Film", Height=550µm, Lifecycle Status=Production, Mounting Technology="Surface Mount", Number of Terminals=2, Packaging="Cut Tape", Power Rating=2W, Pricing="1=0.5, 10=0.291, 25=0.2428, 50=0.2154, 100=0.1937, 250=0.1762, 500=0.14896 (USD)", REACH SVHC=Yes, RoHS=Compliant, Schedule B="8533210025, 8533210025|8533210025, 8533210025|8533210025|8533210025, 8533210025|8533210025|8533210025|8533210025", Stock=8171, Supplier=DigiKey, Voltage Rating=500V, Voltage Rating (DC)=500V, Width=3.2mm, Working Voltage=500V
U1: library part XR2206CP-F
VR1: library part Potentiometer, Manufacturer=Bourns, Manufacturer Part Number=PV36W503C01B00, Max Operating Temperature=125°C, Max Power Dissipation=500mW, Min Operating Temperature=-55°C, Supplier Part Number=118-PV36W503C01B00-ND, Temperature Coefficient=100ppm/°C, Tolerance=10%, Category="Variable Resistors and Potentiometers", ComponentLink1Description=https://datasheet.octopart.com:443/PV36W503C01B00-Bourns-datasheet-182141976.pdf?src-supplier=JRH+Electronics, ComponentLink1URL=https://datasheet.octopart.com:443/PV36W503C01B00-Bourns-datasheet-182141976.pdf?src-supplier=JRH+Electronics, ComponentLink2Description=https://datasheet.octopart.com:443/PV36W503C01B00-Bourns-datasheet-154729827.pdf?src-supplier=Electro+Sonic, ComponentLink2URL=https://datasheet.octopart.com:443/PV36W503C01B00-Bourns-datasheet-154729827.pdf?src-supplier=Electro+Sonic, ComponentLink3Description=https://datasheet.octopart.com:443/PV36W503C01B00-Bourns-datasheet-177040424.pdf?src-supplier=Burklin+Elektronik, ComponentLink3URL=https://datasheet.octopart.com:443/PV36W503C01B00-Bourns-datasheet-177040424.pdf?src-supplier=Burklin+Elektronik, ComponentLink4Description=https://datasheet.octopart.com:443/PV36W503C01B00-Bourns-datasheet-165058412.pdf?src-supplier=Burklin+Elektronik, ComponentLink4URL=https://datasheet.octopart.com:443/PV36W503C01B00-Bourns-datasheet-165058412.pdf?src-supplier=Burklin+Elektronik, ComponentLink5Description=https://datasheet.octopart.com:443/PV36W503C01B00-Bourns-datasheet-103142593.pdf?src-supplier=TME, ComponentLink5URL=https://datasheet.octopart.com:443/PV36W503C01B00-Bourns-datasheet-103142593.pdf?src-supplier=TME, ComponentLink6Description=http://sigma.octopart.com:80/conflict_mineral_statement/Bourns-company-36.pdf?src-supplier=Compliance+Statements, ComponentLink6URL=http://sigma.octopart.com:80/conflict_mineral_statement/Bourns-company-36.pdf?src-supplier=Compliance+Statements, Composition=Cermet, Contact Plating=Tin, Height=10.03mm, Lead Diameter=510µm, Lead Length=6.4mm, Lifecycle Status=Production, Mounting Technology="Through Hole", Number of Terminals=3, Number of Turns=25, Power Dissipation=500mW, Pricing="1=1.53, 10=1.291, 25=1.2048, 50=1.1432, 100=1.0844, 300=0.99703, 500=0.95864, 1000=0.90877, 5000=0.80229 (USD)", REACH SVHC=No, RoHS=Compliant, Schedule B="8533400080, 8533400080|8533400080|8533400080|8533400080|8533400080", Stock=4549, Supplier=DigiKey, Termination="PC Pins", Width=4.83mm
VR2: library part Potentiometer_1, Manufacturer=Bourns, Manufacturer Part Number=PV36W503C01B00, Max Operating Temperature=125°C, Max Power Dissipation=500mW, Min Operating Temperature=-55°C, Supplier Part Number=118-PV36W503C01B00-ND, Temperature Coefficient=100ppm/°C, Tolerance=10%, Category="Variable Resistors and Potentiometers", ComponentLink1Description=https://datasheet.octopart.com:443/PV36W503C01B00-Bourns-datasheet-182141976.pdf?src-supplier=JRH+Electronics, ComponentLink1URL=https://datasheet.octopart.com:443/PV36W503C01B00-Bourns-datasheet-182141976.pdf?src-supplier=JRH+Electronics, ComponentLink2Description=https://datasheet.octopart.com:443/PV36W503C01B00-Bourns-datasheet-154729827.pdf?src-supplier=Electro+Sonic, ComponentLink2URL=https://datasheet.octopart.com:443/PV36W503C01B00-Bourns-datasheet-154729827.pdf?src-supplier=Electro+Sonic, ComponentLink3Description=https://datasheet.octopart.com:443/PV36W503C01B00-Bourns-datasheet-177040424.pdf?src-supplier=Burklin+Elektronik, ComponentLink3URL=https://datasheet.octopart.com:443/PV36W503C01B00-Bourns-datasheet-177040424.pdf?src-supplier=Burklin+Elektronik, ComponentLink4Description=https://datasheet.octopart.com:443/PV36W503C01B00-Bourns-datasheet-165058412.pdf?src-supplier=Burklin+Elektronik, ComponentLink4URL=https://datasheet.octopart.com:443/PV36W503C01B00-Bourns-datasheet-165058412.pdf?src-supplier=Burklin+Elektronik, ComponentLink5Description=https://datasheet.octopart.com:443/PV36W503C01B00-Bourns-datasheet-103142593.pdf?src-supplier=TME, ComponentLink5URL=https://datasheet.octopart.com:443/PV36W503C01B00-Bourns-datasheet-103142593.pdf?src-supplier=TME, ComponentLink6Description=http://sigma.octopart.com:80/conflict_mineral_statement/Bourns-company-36.pdf?src-supplier=Compliance+Statements, ComponentLink6URL=http://sigma.octopart.com:80/conflict_mineral_statement/Bourns-company-36.pdf?src-supplier=Compliance+Statements, Composition=Cermet, Contact Plating=Tin, Height=10.03mm, Lead Diameter=510µm, Lead Length=6.4mm, Lifecycle Status=Production, Mounting Technology="Through Hole", Number of Terminals=3, Number of Turns=25, Power Dissipation=500mW, Pricing="1=1.53, 10=1.291, 25=1.2048, 50=1.1432, 100=1.0844, 300=0.99703, 500=0.95864, 1000=0.90877, 5000=0.80229 (USD)", REACH SVHC=No, RoHS=Compliant, Schedule B="8533400080, 8533400080|8533400080|8533400080|8533400080|8533400080", Stock=4549, Supplier=DigiKey, Termination="PC Pins", Width=4.83mm
VR3: library part Potentiometer_2, Manufacturer=Bourns, Manufacturer Part Number=PV36W503C01B00, Max Operating Temperature=125°C, Max Power Dissipation=500mW, Min Operating Temperature=-55°C, Supplier Part Number=118-PV36W503C01B00-ND, Temperature Coefficient=100ppm/°C, Tolerance=10%, Category="Variable Resistors and Potentiometers", ComponentLink1Description=https://datasheet.octopart.com:443/PV36W503C01B00-Bourns-datasheet-182141976.pdf?src-supplier=JRH+Electronics, ComponentLink1URL=https://datasheet.octopart.com:443/PV36W503C01B00-Bourns-datasheet-182141976.pdf?src-supplier=JRH+Electronics, ComponentLink2Description=https://datasheet.octopart.com:443/PV36W503C01B00-Bourns-datasheet-154729827.pdf?src-supplier=Electro+Sonic, ComponentLink2URL=https://datasheet.octopart.com:443/PV36W503C01B00-Bourns-datasheet-154729827.pdf?src-supplier=Electro+Sonic, ComponentLink3Description=https://datasheet.octopart.com:443/PV36W503C01B00-Bourns-datasheet-177040424.pdf?src-supplier=Burklin+Elektronik, ComponentLink3URL=https://datasheet.octopart.com:443/PV36W503C01B00-Bourns-datasheet-177040424.pdf?src-supplier=Burklin+Elektronik, ComponentLink4Description=https://datasheet.octopart.com:443/PV36W503C01B00-Bourns-datasheet-165058412.pdf?src-supplier=Burklin+Elektronik, ComponentLink4URL=https://datasheet.octopart.com:443/PV36W503C01B00-Bourns-datasheet-165058412.pdf?src-supplier=Burklin+Elektronik, ComponentLink5Description=https://datasheet.octopart.com:443/PV36W503C01B00-Bourns-datasheet-103142593.pdf?src-supplier=TME, ComponentLink5URL=https://datasheet.octopart.com:443/PV36W503C01B00-Bourns-datasheet-103142593.pdf?src-supplier=TME, ComponentLink6Description=http://sigma.octopart.com:80/conflict_mineral_statement/Bourns-company-36.pdf?src-supplier=Compliance+Statements, ComponentLink6URL=http://sigma.octopart.com:80/conflict_mineral_statement/Bourns-company-36.pdf?src-supplier=Compliance+Statements, Composition=Cermet, Contact Plating=Tin, Height=10.03mm, Lead Diameter=510µm, Lead Length=6.4mm, Lifecycle Status=Production, Mounting Technology="Through Hole", Number of Terminals=3, Number of Turns=25, Power Dissipation=500mW, Pricing="1=1.53, 10=1.291, 25=1.2048, 50=1.1432, 100=1.0844, 300=0.99703, 500=0.95864, 1000=0.90877, 5000=0.80229 (USD)", REACH SVHC=No, RoHS=Compliant, Schedule B="8533400080, 8533400080|8533400080|8533400080|8533400080|8533400080", Stock=4549, Supplier=DigiKey, Termination="PC Pins", Width=4.83mm

## Nets (pads, with @x,y where several pads share a name; then routed paths per layer and width w, separated by ;. In a path a pad name is that pad's centre, name@x,y a point inside that pad or via, vN(x,y) a via of type N, cw(c..) or ccw(c..) an arc to the next point about the centre after c; other vN are vias at no path point)
1-10: C4.1 J4.6 | length 1660.8
  Top Layer w10: J4.6 722.87,1677.05 1260.87,1677.05 1442.13,1495.79 1442.13,729.75 C4.1
3-65k: C7.1 J4.9 | length 811.1
  Top Layer w10: J4.9 830.87,1269.05 830.87,769.05 C7.1
10-100: C5.1 J4.7 | length 2413.2
  Bottom Layer w10: J4.7 647.87,1652.05 413.87,1652.05 166.87,1405.05 166.87,826.05 207.87,785.05 1203.02,785.05 C5.1
65k-1M: C8.1 J4.10 | length 664.3
  Top Layer w10: J4.10 758.87,1241.05 758.87,728.05 C8.1
100-3k: C6.1 J4.8 | length 989.8
  Top Layer w10: J4.8 999.87,1200.05 999.87,790.05 C6.1
BIAS: C3.2 U1.10 | length 517.3
  Top Layer w10: U1.10 1680.87,1104.05 1680.87,1037.69 C3.2
Decider: J3.4 R3.2 | length 1668.6
  Bottom Layer w10: J3.4 2660.87,1727.05 2705.87,1682.05 2705.87,775.05 R3.2
FB_PATH: R3.1 U1.13 | length 1993.4
  Top Layer w10: U1.13 1747.87,1337.05 1747.87,1043.05 2299.87,491.05 2299.87,242.05 2342.87,199.05 2579.87,199.05 R3.1
GND: C1.1 C2.1 C3.1 J1.2 J2.3 R4.1 U1.1 U1.12 VR3.2w | length 5261.8
  Top Layer w10: U1.1 1287.87,1827.05 1352.87,1762.05 1352.87,1632.05 U1.12 ; C3.1 1876.75,1143.05 1891.02,1157.32 C2.1 ; R4.1 2382.87,596.05 2637.87,851.05 J2.3
  Bottom Layer w10: J1.2 269.48,1038.66 C3.1 C1.1 2148.36,1012.05 J2.3 ; U1.12 1722.87,1262.05 C2.1 ; VR3.2w 1951.3,277.05 R4.1
Mod_OUT: U1.3 VR1.1 VR1.2w | length 2259.1
  Top Layer w10: VR1.1 417.28,297.46 760.87,641.05 1132.87,641.05 1143.87,652.05 1143.87,745.05 1053.87,835.05 1053.87,1533.05 U1.3
  Bottom Layer w10: VR1.1 VR1.2w
SQR: J2.2 R1.2 U1.11 | length 1961.7
  Top Layer w10: J2.2 2594.87,1155.05 2594.87,1819.05 R1.2
  Bottom Layer w10: U1.11 1772.87,1112.05 J2.2
STO: J2.1 U1.2 | length 1956.3
  Bottom Layer w10: U1.2 1302.87,1572.05 2641.87,1572.05 2685.87,1528.05 2685.87,1260.05 J2.1
TC1: J4.1 J4.2 J4.3 J4.4 J4.5 U1.5 | length 1000.6
  Top Layer w10: J4.5 J4.4 J4.3 J4.2 J4.1
  Bottom Layer w10: J4.4 637.87,1362.05 1082.87,1362.05 U1.5
TC2: C4.2 C5.2 C6.2 C7.2 C8.2 U1.6 | length 1229
  Top Layer w10: C6.2 1102.87,1282.05 U1.6
  Bottom Layer w10: C8.2 C7.2 C6.2 1197.87,883.9 1201.02,887.05 C5.2 1388.87,887.05 1390.32,885.6 C4.2
TR1: R5.2 U1.7 | length 1742.5
  Top Layer w10: U1.7 1422.13,952.79 1422.13,596.79 1911.87,107.05 R5.2
VCC: C1.2 C2.2 J1.1 R1.1 R2.2 U1.4 | length 3387
  Top Layer w10: C2.2 2162.87,1187.05 2162.87,882.93 C1.2
  Bottom Layer w10: J1.1 247.87,1417.05 287.87,1457.05 1077.87,1457.05 U1.4 1197.87,1477.05 1872.87,1477.05 C2.2 2247.87,1422.05 R2.2 2502.87,1422.05 2507.87,1417.05 R1.1
VR1_path: R5.1 VR2.1 | length 1982.5
  Bottom Layer w10: VR2.1 1022.87,175.05 1259.87,412.05 2362.87,412.05 R5.1
VR2_path: VR2.2w VR3.1 | length 560.1
  Bottom Layer w10: VR2.2w 1170.3,111.05 1598.87,111.05 VR3.1
Vtg_dvr: R2.1 R4.2 VR1.3 | length 3404.6
  Top Layer w10: R2.1 2324.87,1829.05 2324.87,785.05 R4.2
  Bottom Layer w10: VR1.3 614.13,357.31 692.87,436.05 2091.87,436.05 R4.2
Wave_A2: J3.3 U1.14 | length 421.4
  Bottom Layer w10: U1.14 1657.87,1727.05 J3.3
pads on no net: J3.1 J3.2 U1.8 U1.9 U1.15 U1.16 VR1.4 VR1.5 VR2.3 VR2.4 VR2.5 VR3.3 VR3.4 VR3.5

## Silkscreen, mask and mechanical layers (free items; w line width, h text height)
Top Overlay:
  text "Function generator" at 92.88,667.05 h60 r90

## Text inside footprints (layer, text, board x,y; h text height)
C1: Mechanical 13 "RefDes2" at 1946.75,1018.66 h50 r270
C2: Mechanical 13 "RefDes2" at 1911.02,1152.05 h50
C3: Mechanical 13 "RefDes2" at 1766.75,1018.66 h50 r270
C4: Mechanical 13 "RefDes2" at 1593.13,708.75 h50 r90
C5: Mechanical 13 "RefDes2" at 1407.87,710.2 h50 r90
C6: Mechanical 13 "RefDes2" at 1212.87,707.05 h50 r90
C7: Mechanical 13 "RefDes2" at 1022.87,707.05 h50 r90
C8: Mechanical 13 "RefDes2" at 827.87,707.05 h50 r90
J1: Mechanical 13 "RefDes2" at 222.87,1154.55 h50 r270
J2: Mechanical 13 "RefDes2" at 2667.87,1092.05 h50 r180
J3: Mechanical 13 "RefDes2" at 1977.87,1662.05 h50
J4: Mechanical 13 "RefDes2" at 617.87,1594.55 h50 r270
R1: Mechanical 13 "RefDes2" at 2667.87,1554.55 h50 r90
R2: Mechanical 13 "RefDes2" at 2342.87,1787.05 h50 r270
R3: Mechanical 13 "RefDes2" at 2677.87,409.55 h50 r90
R4: Mechanical 13 "RefDes2" at 2407.87,414.55 h50 r90
R5: Mechanical 13 "RefDes2" at 2530.37,132.05 h50 r180
VR1: Mechanical 13 "RefDes2" at 428.21,36.46 h50
VR2: Mechanical 13 "RefDes2" at 1033.8,37.05 h50
VR3: Mechanical 13 "RefDes2" at 1653.8,42.05 h50